# EAGLE board watter.flow.metter.pannel (EAGLE 8.2.2)
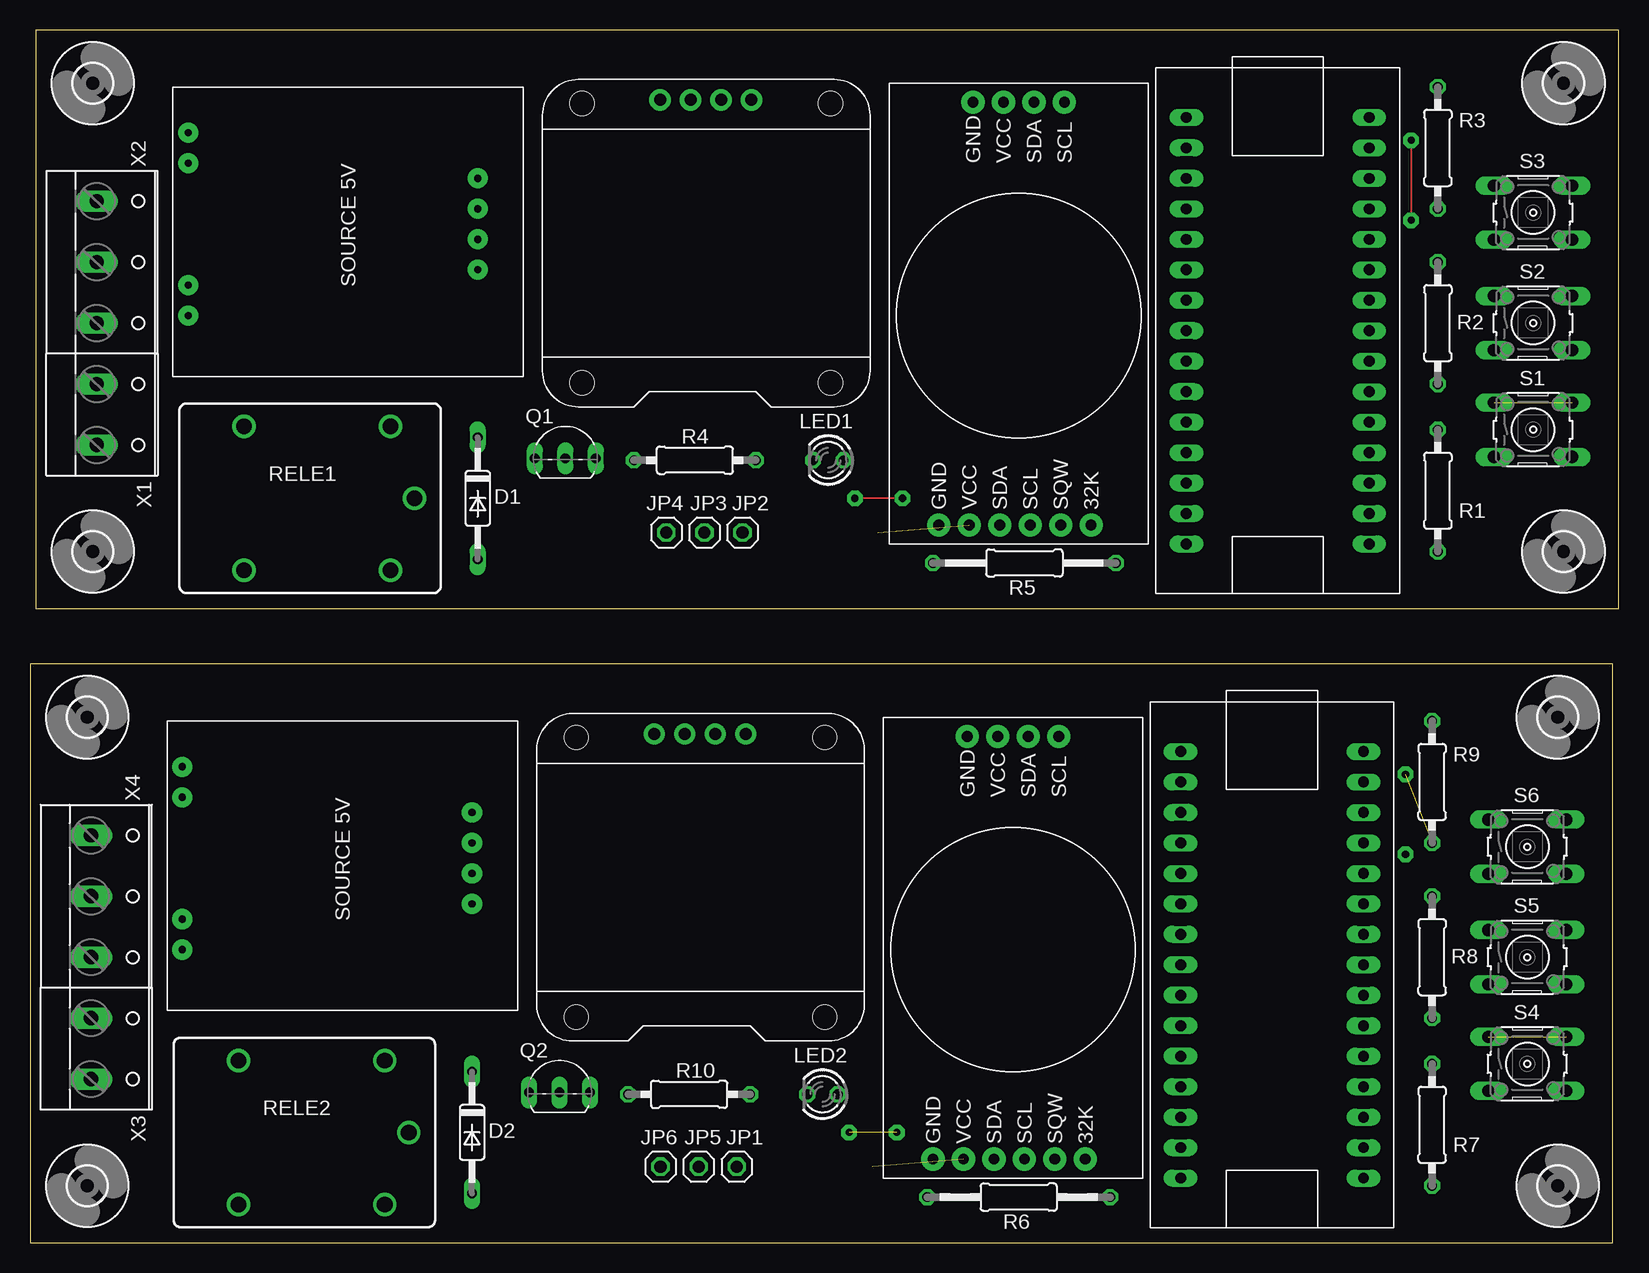
[diagram p0: board, top side]
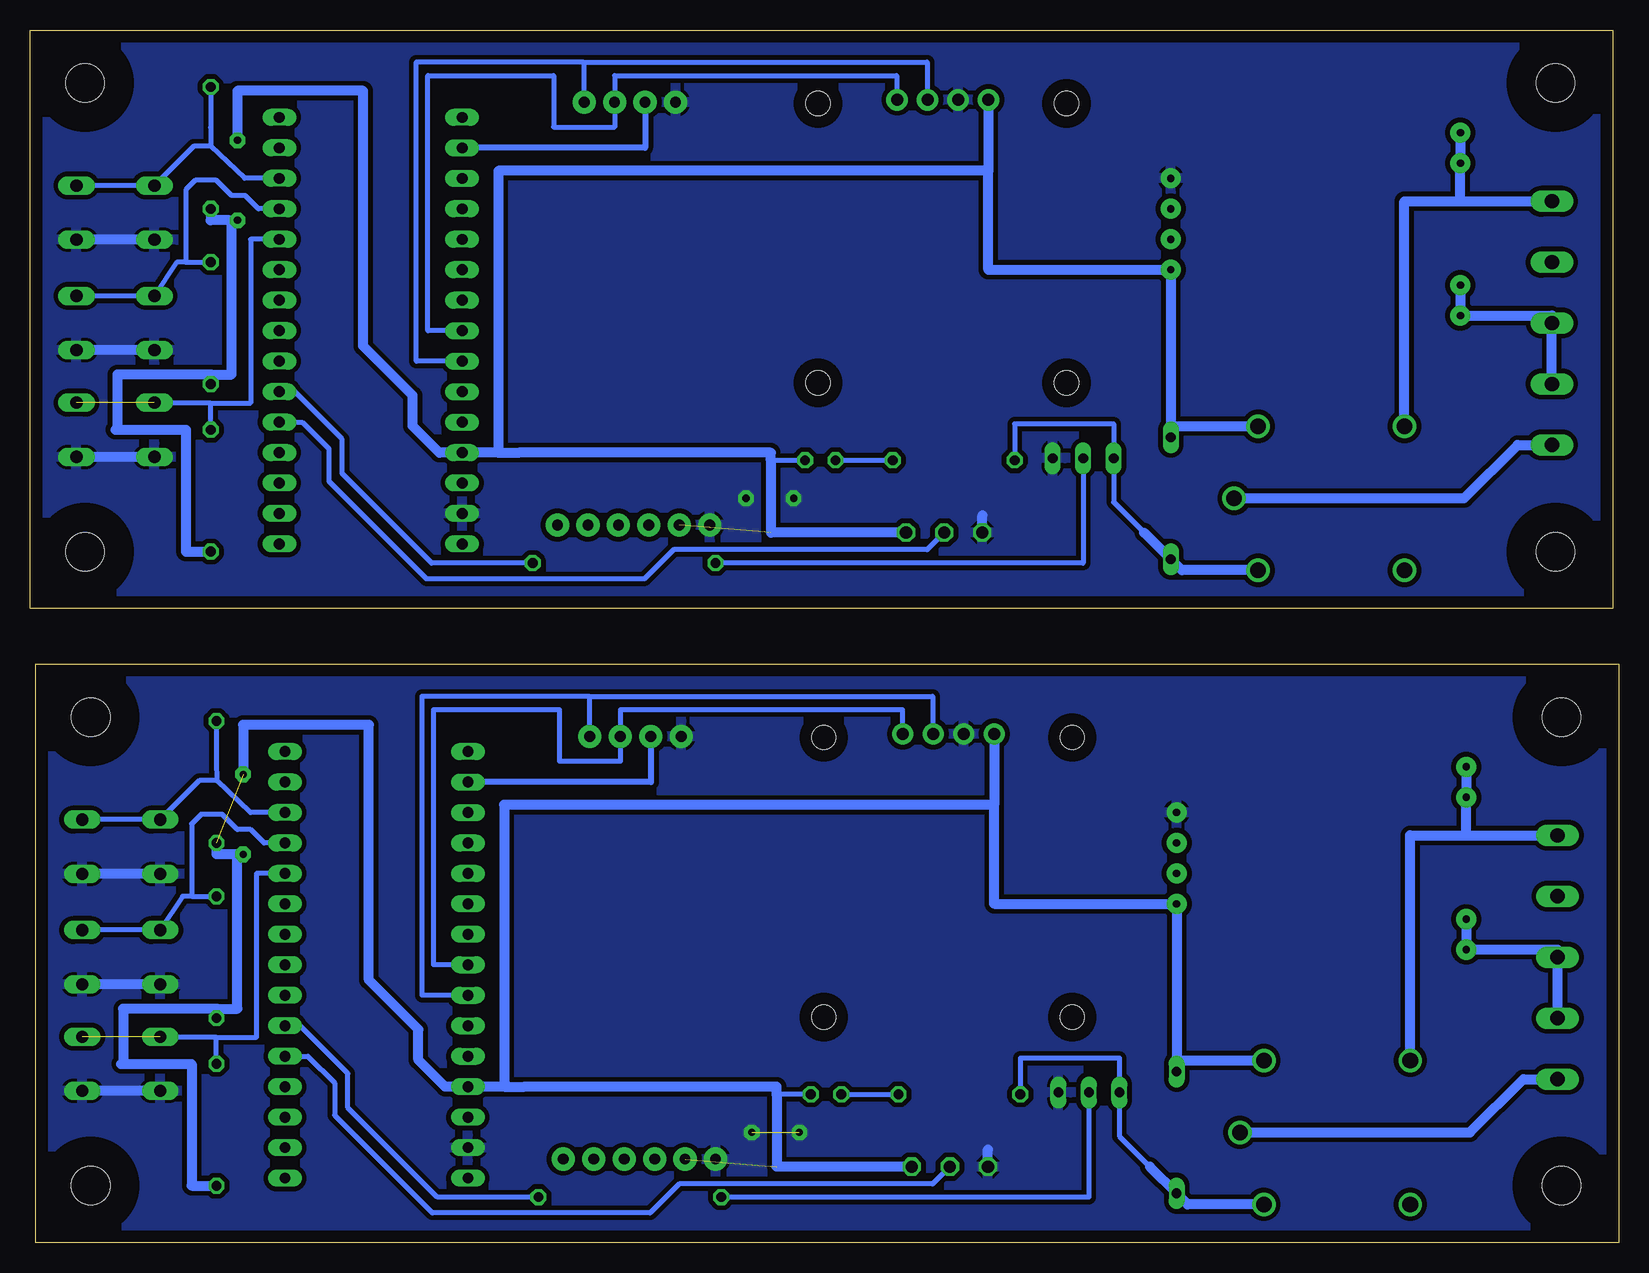
[diagram p1: board, bottom side, seen from below]

Size 132.38 x 101.11 mm. Coordinates in mm from the lower left corner, seen from the top.
Outline: 0.48,52.86 132.38,52.86 132.38,101.11 0.48,101.11 0.48,52.86
Outline: 0,0 131.9,0 131.9,48.25 0,48.25 0,0
Copper layers (1*16): Top 0.035mm / dielectric 1.5mm / Bottom 0.035mm
Design rules "default": minimum track width 6mil, minimum drill 0.35mm, track to track 6mil, track to pad 6mil, pad to pad 6mil, via to via 6mil, smd to smd 6mil, copper to edge 40mil, drill to drill 6mil, minimum pad ring 10mil, minimum via ring 8mil, stop-mask expansion 4mil, vias tented up to drill 0mil, thermal gap 10mil
Net classes: 0 default: width 0.406 mm, drill 0.406 mm, clearance 0.406 mm; 3 power usb: width 0.508 mm, drill 0.406 mm, clearance 0.203 mm

## Footprints (pad centres in the part's own frame; a part is rotated, then mirrored left to right if it is on the bottom)
DO35-10 = drill 0.813 long: A 5.08,0; C -5.08,0
OLED_0.96_I2C = drill 1 pad 1.778: GND -1.63,11.63; SCL 0.91,11.63; SDA 3.45,11.63; VCC -4.17,11.63 | hole 2: -10.67,-11.97; 10.03,-11.97; 10.03,11.33; -10.67,11.33
1X01 = drill 1.016 octagon: 1 0,0
LED3MM = drill 0.813 octagon: A -1.27,0; K 1.27,0
TO92-EBC = drill 0.813 long: B 0,-1.27; C -2.54,-1.27; E 2.54,-1.27
0207/10 = drill 0.813 octagon: 1 -5.08,0; 2 5.08,0
0207/15 = drill 0.813 octagon: 1 -7.62,0; 2 7.62,0
JS-M = drill 1.3: 1 6.7,6; 2 6.7,-6; C 8.7,0; NC -5.5,-6; NO -5.5,6
B3F-10XX = drill 1.016 long: 1 -3.251,2.261; 2 3.251,2.261; 3 -3.251,-2.261; 4 3.251,-2.261
NANO = drill 0.9 long: 3.3V -10.16,24.13; 5V -10.16,-1.27; A0 -10.16,19.05; A1 -10.16,16.51; A2 -10.16,13.97; A3 -10.16,11.43; A4 -10.16,8.89; A5 -10.16,6.35; A6 -10.16,3.81; A7 -10.16,1.27; AREF -10.16,21.59; D2 5.08,1.27; D3 5.08,3.81; D4 5.08,6.35; D5 5.08,8.89; D6 5.08,11.43; D7 5.08,13.97; D8 5.08,16.51; D9 5.08,19.05; D10 5.08,21.59; D11 5.08,24.13; D12 5.08,26.67; D13 -10.16,26.67; GND -10.16,-6.35; GND1 5.08,-1.27; RAW -10.16,-8.89; RST -10.16,-3.81; RST1 5.08,-3.81; RX1 5.08,-6.35; TX0 5.08,-8.89
SUPP = drill 0.6 pad 1.676: P$1 -12.7,-10.16; P$2 -10.16,-10.16; P$3 0,-10.16; P$4 2.54,-10.16; P$5 -8.89,13.97; P$6 -6.35,13.97; P$7 -3.81,13.97; P$8 -1.27,13.97
3,2 = hole 3.2: 0,0
BOARD = drill 0.9 pad 1.93: 32K 16.828,-36.83; GND@1 4.128,-36.83; GND@2 6.985,-1.587; SCL@1 11.748,-36.83; SCL@2 14.605,-1.587; SDA@1 9.207,-36.83; SDA@2 12.065,-1.587; SQW 14.287,-36.83; VCC@1 6.668,-36.83; VCC@2 9.525,-1.587
W237-132 = drill 1.194 long: 1 -2.54,-0.635; 2 2.54,-0.635
W237-3E = drill 1.194 long: 1 -5.08,-0.635; 2 0,-0.635; 3 5.08,-0.635

## Placement (x,y rotation side)
D1  1N4148DO35-10  [DO35-10]  37.31,62.07 270 top
D2  1N4148DO35-10  [DO35-10]  36.83,9.21 270 top
DISPLAY  OLED_0.96_I2C  [OLED_0.96_I2C]  56.67,83.66 0 top
DISPLAY1  OLED_0.96_I2C  [OLED_0.96_I2C]  56.2,30.8 0 top
JP1  [1X01]  58.9,6.35 0 top
JP2  [1X01]  59.37,59.21 0 top
JP3  [1X01]  56.2,59.21 0 top
JP4  [1X01]  53.02,59.21 0 top
JP5  [1X01]  55.72,6.35 0 top
JP6  [1X01]  52.55,6.35 0 top
LED1  [LED3MM]  66.52,65.25 180 top
LED2  [LED3MM]  66.04,12.38 180 top
Q1  BC546A  [TO92-EBC]  44.61,66.67 0 top
Q2  BC546A  [TO92-EBC]  44.13,13.81 0 top
R1  [0207/10]  117.32,62.71 270 top
R2  [0207/10]  117.32,76.68 270 top
R3  [0207/10]  117.32,91.28 270 top
R4  [0207/10]  55.4,65.25 0 top
R5  [0207/15]  82.87,56.67 180 top
R6  [0207/15]  82.39,3.81 180 top
R7  [0207/10]  116.84,9.84 270 top
R8  [0207/10]  116.84,23.81 270 top
R9  [0207/10]  116.84,38.42 270 top
R10  [0207/10]  54.93,12.38 0 top
RELE1  JS-M1-9V-4  [JS-M]  23.34,62.07 0 top
RELE2  JS-M1-9V-4  [JS-M]  22.86,9.21 0 top
S1  [B3F-10XX]  125.25,67.79 0 top
S2  [B3F-10XX]  125.25,76.68 0 top
S3  [B3F-10XX]  125.25,85.88 0 top
S4  [B3F-10XX]  124.78,14.92 0 top
S5  [B3F-10XX]  124.78,23.81 0 top
S6  [B3F-10XX]  124.78,33.02 0 top
U$1  NANO  [NANO]  106.04,14.29 0 top
U$2  PWR5V  [SUPP]  23.34,79.85 270 top
U$3  [3,2]  5.24,96.68 0 top
U$4  [3,2]  5.24,57.63 0 top
U$5  NANO  [NANO]  106.52,67.15 0 top
U$6  DS3231BOARD  [BOARD]  71.6,96.68 0 top
U$7  [3,2]  127.79,96.68 0 top
U$8  [3,2]  127.79,57.63 0 top
U$9  DS3231BOARD  [BOARD]  71.12,43.82 0 top
U$10  PWR5V  [SUPP]  22.86,26.99 270 top
U$11  [3,2]  4.76,43.82 0 top
U$12  [3,2]  4.76,4.76 0 top
U$13  [3,2]  127.32,43.82 0 top
U$14  [3,2]  127.32,4.76 0 top
X1  [W237-132]  6.19,69.06 270 top
X2  [W237-3E]  6.19,81.76 270 top
X3  [W237-132]  5.71,16.19 270 top
X4  [W237-3E]  5.71,28.89 270 top

## Library data of the parts
D1 D2 = diode
DISPLAY DISPLAY1 = tft_1.8_1.44_oled_0.96
JP1-JP6 = pinhead
LED1 LED2 = led
Q1 Q2 = transistor-npn
R1-R10 = rcl
RELE1 RELE2 = relay; OC_FARNELL: unknown; OC_NEWARK: unknown
S1-S6 = switch-omron; MPN: B3F-1000; OC_FARNELL: 176432; OC_NEWARK: 36M3542
U$1 U$5 = Arduino
U$2 U$10 = SOURCE
U$3 U$4 U$7 U$8 U$11-U$14 = holes
U$6 U$9 = DS3232M
X1-X4 = con-wago-508; OC_FARNELL: unknown; OC_NEWARK: unknown

## Nets
3.3V: U$5.3.3V U$6.VCC@2
3.3V1: U$1.3.3V U$9.VCC@2
D1: JP5.1 U$1.D2
D2: JP3.1 U$5.D2
D3: R5.1 U$5.D3
D4: R6.1 U$1.D3
GND: DISPLAY.GND JP4.1 Q1.E S1.3 S1.4 S2.3 S2.4 S3.3 S3.4 U$2.P$5 U$5.GND U$6.GND@1 U$6.GND@2
GND1: DISPLAY1.GND JP6.1 Q2.E S4.3 S4.4 S5.3 S5.4 S6.3 S6.4 U$1.GND U$9.GND@1 U$9.GND@2 U$10.P$5
N$1: RELE1.C X1.2
N$2: R1.1 S1.1 S1.2 U$5.D8
N$3: U$2.P$3 U$2.P$4 X1.1 X2.3
N$4: RELE1.NO U$2.P$1 U$2.P$2 X2.1
N$5: R2.1 S2.1 S2.2 U$5.D9
N$6: R3.1 S3.1 S3.2 U$5.D10
N$7: Q1.B R5.2
N$8: LED1.K R4.2
N$9: D2.A Q2.C R10.1 RELE2.2
N$10: U$10.P$3 U$10.P$4 X3.1 X4.3
N$11: RELE2.NO U$10.P$1 U$10.P$2 X4.1
N$12: RELE2.C X3.2
N$13: R7.1 S4.1 S4.2 U$1.D8
N$14: R8.1 S5.1 S5.2 U$1.D9
N$15: R9.1 S6.1 S6.2 U$1.D10
N$16: Q2.B R6.2
N$17: LED2.K R10.2
N$41: D1.A Q1.C R4.1 RELE1.2
SCL: DISPLAY.SCL U$5.A5 U$6.SCL@2
SCL1: DISPLAY1.SCL U$1.A5 U$9.SCL@2
SDA: DISPLAY.SDA U$5.A4 U$6.SDA@2
SDA1: DISPLAY1.SDA U$1.A4 U$9.SDA@2
VCC: D1.C DISPLAY.VCC JP2.1 LED1.A R1.2 R2.2 R3.2 RELE1.1 U$2.P$8 U$5.5V U$6.VCC@1
VCC1: D2.C DISPLAY1.VCC JP1.1 LED2.A R7.2 R8.2 R9.2 RELE2.1 U$1.5V U$9.VCC@1 U$10.P$8

## Tracks (layer width: path | path; a pad name or v marks a point on that pad's centre or on a via)
3.3V
  Bottom 0.508: U$6.VCC@2 81.12,91.28 U$5.3.3V
3.3V1
  Bottom 0.508: U$9.VCC@2 80.65,38.42 U$1.3.3V
D1
  Bottom 0.406: JP5.1 57.15,4.92 78.26,4.92 80.7,2.49 98.85,2.49 107,10.64 107,13.33 109.22,15.56 U$1.D2
D2
  Bottom 0.406: JP3.1 57.63,57.78 78.74,57.78 81.17,55.35 99.33,55.35 107.47,63.5 107.47,66.2 109.7,68.42 U$5.D2
D3
  Bottom 0.406: R5.1 98.9,56.67 106.36,64.13 106.36,66.99 110.33,70.96 U$5.D3
D4
  Bottom 0.406: R6.1 98.43,3.81 105.89,11.27 105.89,14.13 109.86,18.1 U$1.D3
GND  (via drill 0.6 pad 1.3)
  Top 0.127: v72.71,62.07 v68.74,62.07
  Bottom 0.813: S3.3 S3.4 | S2.3 S2.4 | S1.3 S1.4 | JP4.1 53.02,60.64 | 55.09,95.25 DISPLAY.GND
  pour Bottom: 0.79,100.97 132.56,100.97 132.56,52.86 0.79,52.86
GND1  (via drill 0.6 pad 1.3)  (1 unrouted)
  Bottom 0.813: S6.3 S6.4 | S5.3 S5.4 | S4.3 S4.4 | JP6.1 52.55,7.78 | 54.61,42.38 DISPLAY1.GND
  other vias: 72.23,9.21 68.26,9.21
  pour Bottom: 0.32,48.1 132.08,48.1 132.08,0 0.32,0
N$1
  Bottom 0.813: RELE1.C 12.86,62.07 8.41,66.52 X1.2
N$2  (1 unrouted)
  Bottom 0.406: U$5.D8 113.98,83.66 113.98,70.01 117.36,70.01 | 117.36,70.01 121.96,70.01 S1.1 | R1.1 117.32,69.97 117.36,70.01
N$3
  Bottom 0.813: X1.1 X2.3 5.56,77.31 U$2.P$4 U$2.P$3
N$4
  Bottom 0.813: U$2.P$1 U$2.P$2 13.18,86.84 | 13.18,86.84 X2.1 | 13.18,86.84 17.84,86.84 RELE1.NO
N$5
  Bottom 0.406: S2.1 S2.2 | S2.1 122.12,78.94 | 119.38,81.76 R2.1 | 119.38,81.76 120.14,81.76 S2.1 | U$5.D9 113.35,86.2 114.46,87.31 115.57,87.31 116.84,88.58 118.59,88.58 119.38,87.79 119.38,81.76
N$6
  Bottom 0.406: S3.1 | S3.1 S3.2 | R3.1 117.32,92.99 117.31,91.41 | U$5.D10 114.48,88.74 117.31,91.41 | 117.31,91.41 118.74,91.41 S3.1
N$7
  Bottom 0.406: Q1.B 44.61,56.67 R5.2
N$8
  Bottom 0.406: LED1.K R4.2
N$9
  Bottom 0.406: R10.1 49.85,15.4 41.59,15.4 Q2.C 41.59,8.89 39.05,6.35
  Bottom 0.813: RELE2.2 35.91,3.21 D2.A 39.05,6.35
N$10
  Bottom 0.813: X3.1 X4.3 5.08,24.45 U$10.P$4 U$10.P$3
N$11
  Bottom 0.813: U$10.P$1 U$10.P$2 12.7,33.97 | 12.7,33.97 X4.1 | 12.7,33.97 17.36,33.97 RELE2.NO
N$12
  Bottom 0.813: RELE2.C 12.38,9.21 7.94,13.65 X3.2
N$13  (1 unrouted)
  Bottom 0.406: U$1.D8 113.51,30.8 113.51,17.14 116.88,17.14 | 116.88,17.14 121.49,17.14 S4.1 | R7.1 116.84,17.1 116.88,17.14
N$14
  Bottom 0.406: S5.1 S5.2 | S5.1 121.64,26.07 | R8.1 118.9,28.89 | 118.9,28.89 119.66,28.89 S5.1 | U$1.D9 112.87,33.34 113.98,34.45 115.09,34.45 116.36,35.72 118.11,35.72 118.9,34.92 118.9,28.89
N$15
  Bottom 0.406: S6.1 | S6.1 S6.2 | R9.1 116.84,40.13 116.83,38.54 | U$1.D10 114.01,35.88 116.83,38.54 | 116.83,38.54 118.27,38.54 S6.1
N$16
  Bottom 0.406: Q2.B 44.13,3.81 R6.2
N$17
  Bottom 0.406: LED2.K R10.2
N$41
  Bottom 0.406: R4.1 50.32,68.26 42.07,68.26 Q1.C 42.07,61.75 39.53,59.21
  Bottom 0.813: RELE1.2 36.39,56.07 D1.A 39.53,59.21
SCL
  Bottom 0.406: 86.28,98.42 100.17,98.42 100.17,73.5 U$5.A5 | 86.28,98.42 57.63,98.42 57.63,95.29 DISPLAY.SCL | 86.2,95.22 U$6.SCL@2 86.2,98.34 86.28,98.42
SCL1
  Bottom 0.406: 85.81,45.56 99.7,45.56 99.7,20.64 U$1.A5 | 85.81,45.56 57.15,45.56 57.15,42.43 DISPLAY1.SCL | 85.73,42.35 U$9.SCL@2 85.73,45.48 85.81,45.56
SDA
  Bottom 0.406: U$5.A4 99.22,76.04 99.22,97.31 88.74,97.31 88.74,93.03 83.66,93.03 U$6.SDA@2 83.66,97.31 60.17,97.31 60.17,95.29 DISPLAY.SDA
SDA1
  Bottom 0.406: U$1.A4 98.74,23.18 98.74,44.45 88.27,44.45 88.27,40.16 83.19,40.16 U$9.SDA@2 83.19,44.45 59.69,44.45 59.69,42.43 DISPLAY1.SDA
VCC  (via drill 0.6 pad 1.3)  (1 unrouted)
  Top 0.127: v115.09,85.25 v115.09,91.92
  Bottom 0.406: LED1.A 70.64,65.23
  Bottom 0.813: 52.55,95.25 DISPLAY.VCC 52.5,89.38 | v115.09,91.92 115.09,96.04 104.62,96.04 104.62,74.77 100.49,70.64 100.49,68.1 98.27,65.88 U$5.5V 92.96,65.88 | 92.96,65.88 91.65,65.88 | 117.28,72.39 115.57,72.39 115.57,85.06 115.76,85.25 | 117.28,72.39 125.1,72.39 125.1,67.94 125.25,67.79 119.38,67.79 119.38,57.63 R1.2 | R2.2 117.32,72.35 117.28,72.39 | R3.2 117.32,85.25 115.76,85.25 | 91.65,65.88 | 91.65,65.88 70.64,65.88 70.64,65.23 70.64,59.21 JP2.1 | LED1.A | 115.76,85.25 v115.09,85.25 | 52.5,89.38 52.5,81.12 U$2.P$8 D1.C 37.31,68.07 RELE1.1 | 52.5,89.38 93.35,89.38 93.35,65.88 92.96,65.88
VCC1  (via drill 0.6 pad 1.3)  (2 unrouted)
  Bottom 0.406: 67.31,12.37 70.17,12.37
  Bottom 0.813: 52.07,42.38 DISPLAY1.VCC 52.03,36.51 | v114.62,39.05 114.62,43.18 104.14,43.18 104.14,21.91 100.01,17.78 100.01,15.24 97.79,13.02 U$1.5V 92.87,13.02 | 91.18,13.02 92.48,13.02 92.87,13.02 | 116.8,19.53 115.09,19.53 115.09,32.2 115.28,32.38 | 116.8,19.53 124.62,19.53 124.62,15.08 124.78,14.92 118.9,14.92 118.9,4.76 R7.2 | R8.2 116.84,19.49 116.8,19.53 | R9.2 116.84,32.38 115.28,32.38 | 91.18,13.02 | 91.18,13.02 70.17,13.02 70.17,12.37 70.17,6.35 JP1.1 | LED2.A 67.31,12.37 | 115.28,32.38 v114.62,32.38 | 52.03,36.51 52.03,28.26 U$10.P$8 D2.C 36.83,15.21 RELE2.1 | 52.03,36.51 92.87,36.51 92.87,13.02